# Altium PCB PCB1.PcbDoc
Units mil, origin at the board's own origin, x right, y up, seen from the top; angles counter-clockwise.
Board outline 2675.03 x 2095.03 mil, 2 copper layers (Top Layer, Bottom Layer); 38 components, 33 nets, 171 pads, 4 vias.
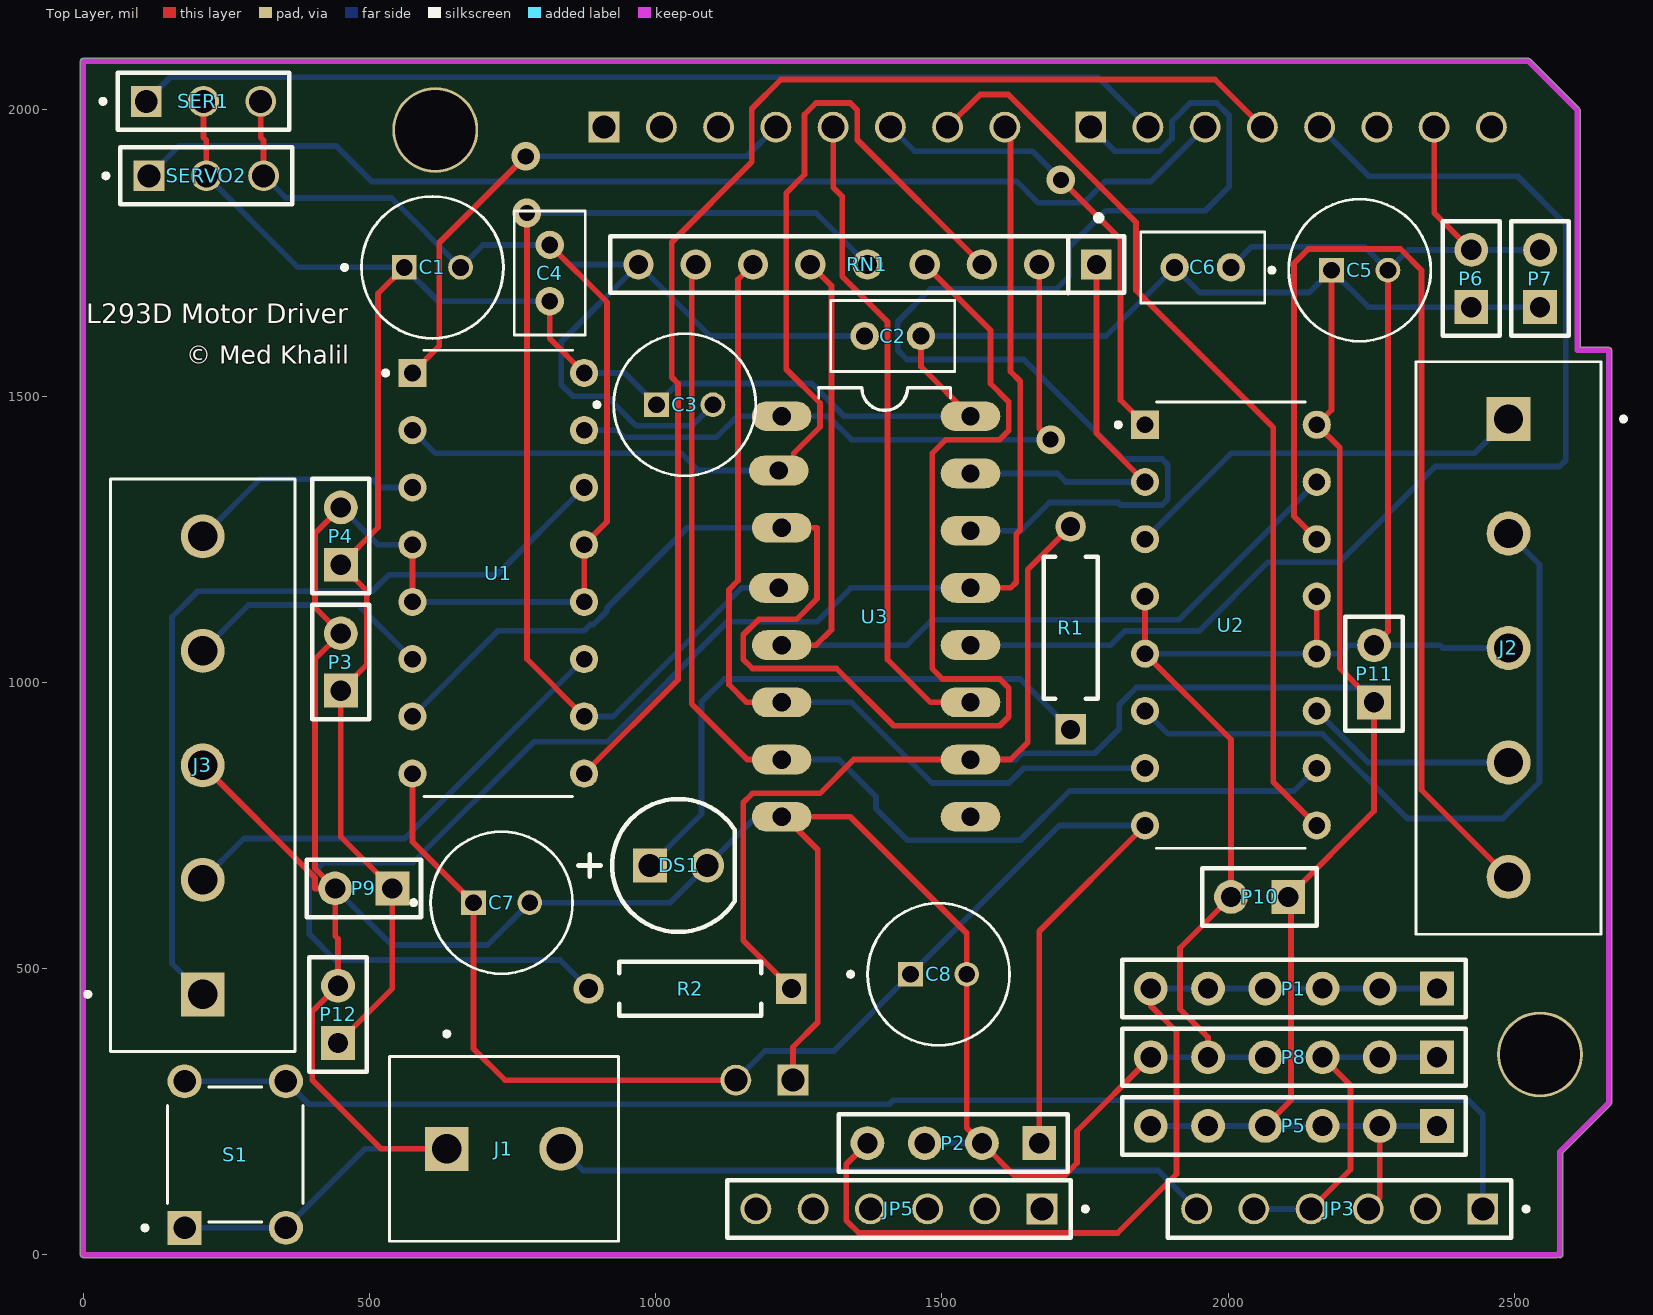
[diagram p0: Top Layer view]
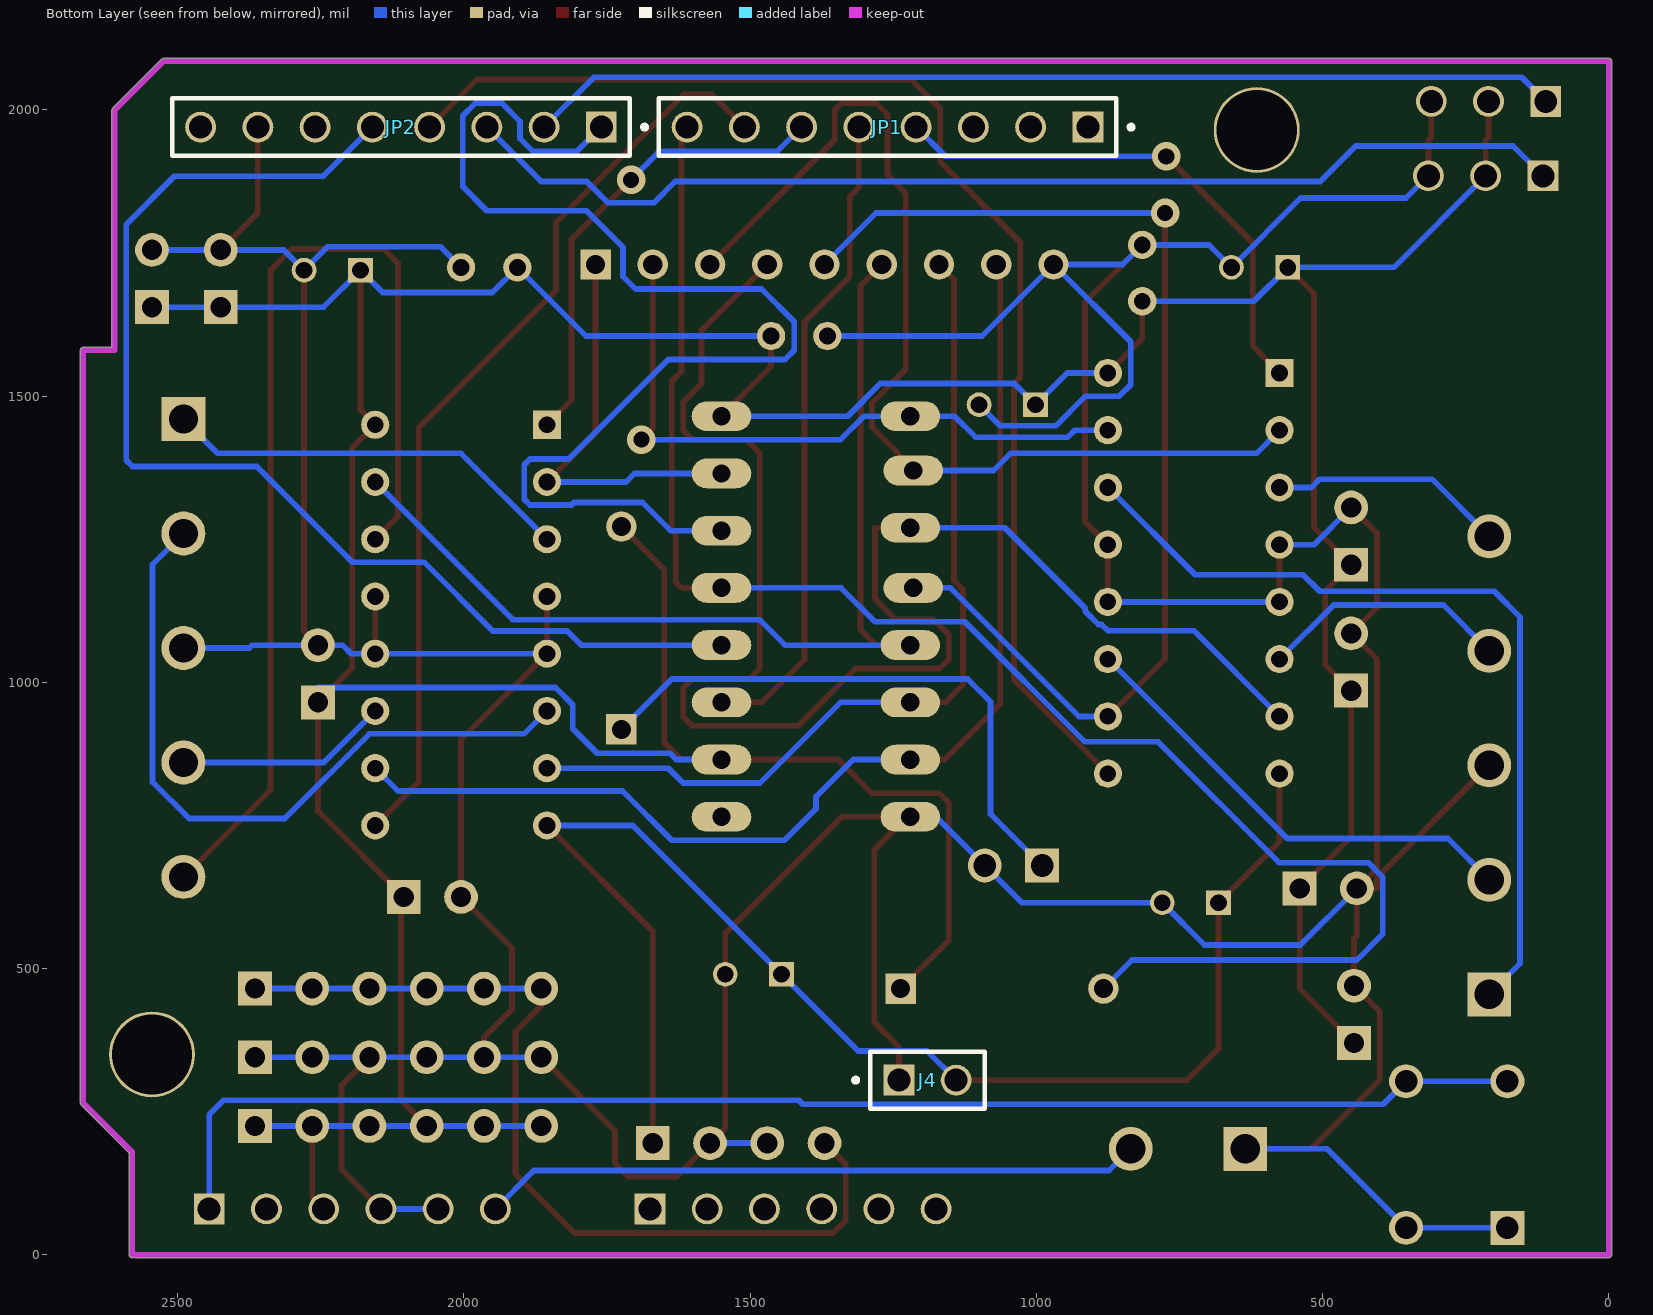
[diagram p1: Bottom Layer view, seen from below]
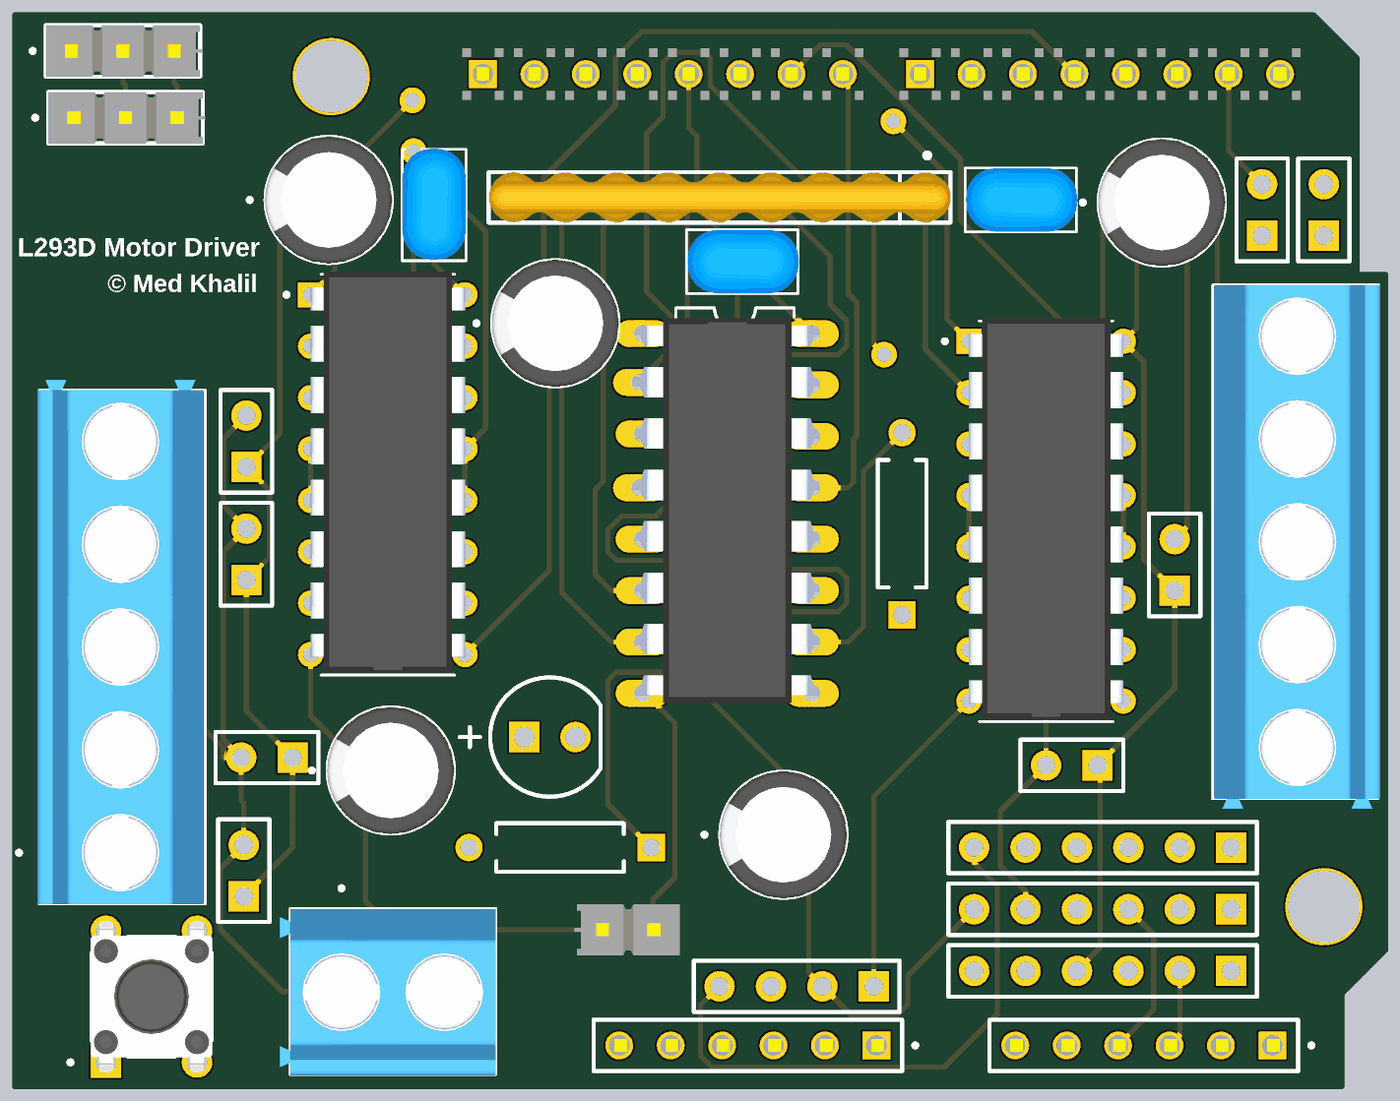
[diagram p2: 3D render of the assembled board from above, using the file's embedded part models]
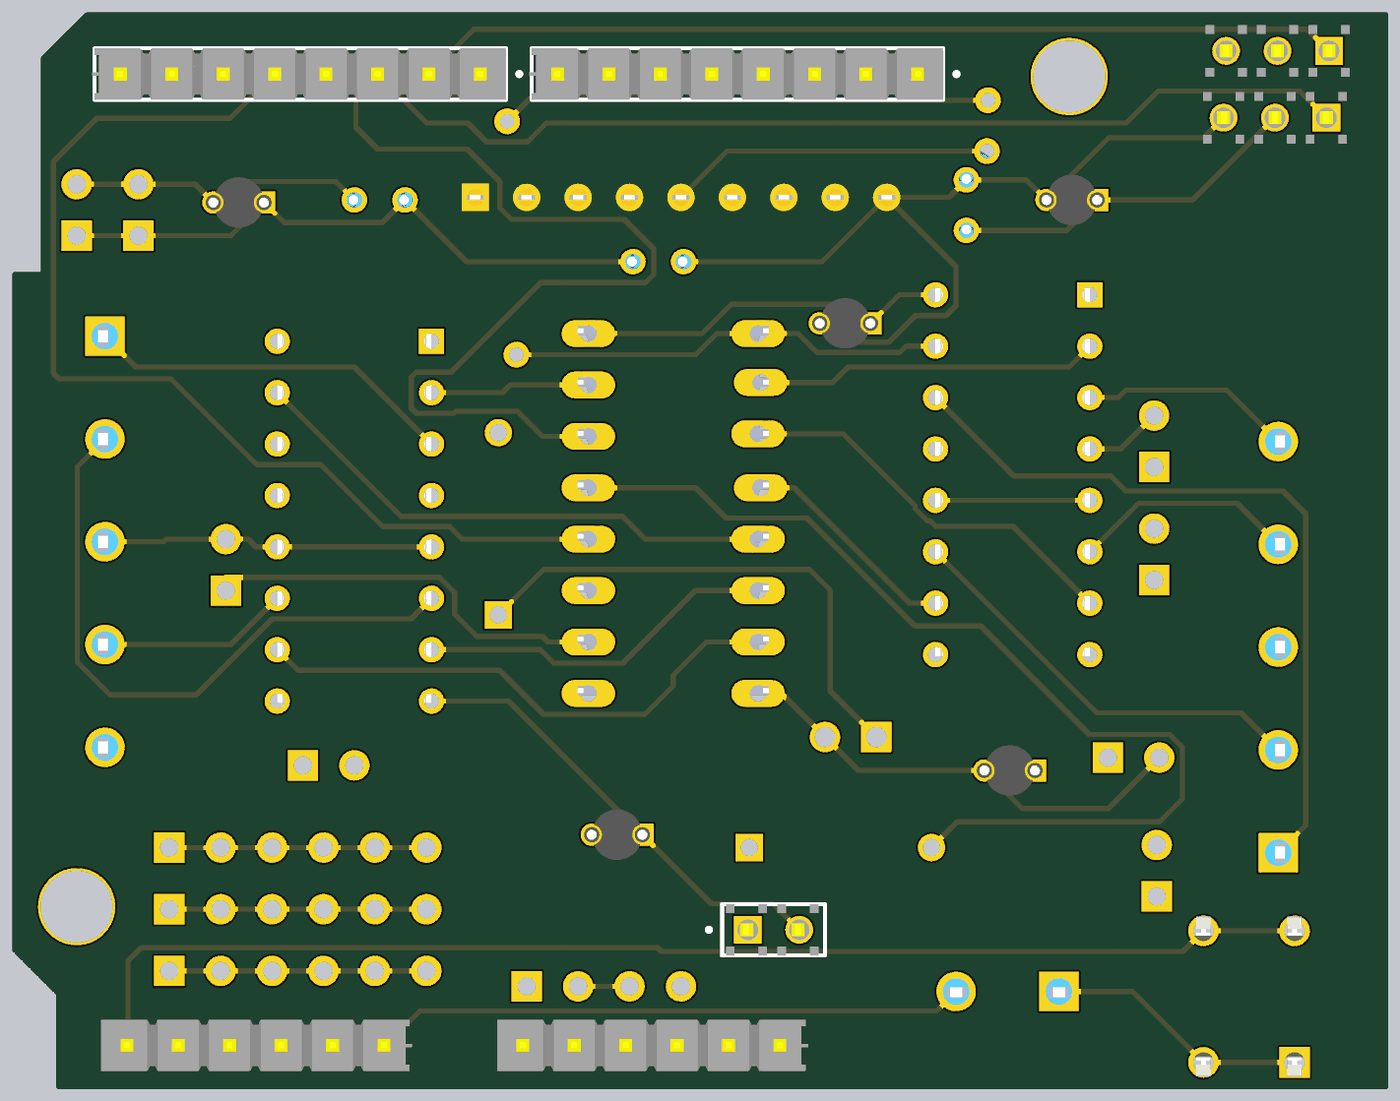
[diagram p3: 3D render of the assembled board from below, using the file's embedded part models]

## Layer stack, top to bottom
Top Solder: solder mask 0.4, Solder Resist, Dk 3.5
Top Layer: signal copper 1.4
Dielectric 1: dielectric 12.6, FR-4, Dk 4.8
Bottom Layer: signal copper 1.4
Bottom Solder: solder mask 0.4, Solder Resist, Dk 3.5

## Board outline
-5.01,0 -5.02,2085 cw(c0,2085) 0,2090.01 2525,2090.01 2528.55,2088.55 2613.55,2003.55 2615.01,2000 2615.01,1585.02 2665,1585.02 cw(c2665,1580) 2670.01,1580 2670.01,265 2668.55,261.45 2585.01,177.92 2585.01,0 cw(c2580,0) 2577.5,-4.35 2575,-5.01 0,-5.01 cw(c0,0)

## Design rules (kind name [scope] priority, off if disabled: settings)
Clearance [All] p1: gap=10 ignorepadtopadclearanceinfootprint=FALSE
PolygonConnect [All] p1: connectstyle=Relief reliefconductorwidth=10 reliefentries=4 polygonreliefangle="90 Angle" airgapwidth=10
RoutingVias [All] p1: holewidth=28 width=50 viastyle="Through Hole" minholewidth=28 minwidth=50 maxholewidth=28 maxwidth=50
SolderMaskExpansion [All] p1: expansion=4 istentingtop=FALSE
SupplyNets "Schematic Supply Nets_2" [InNet('+5')] p1: voltage=0.000
SupplyNets "Schematic Supply Nets_3" [InNet('V+')] p2: voltage=0.000
SupplyNets "Schematic Supply Nets_1" [InNet('VCC')] p3: voltage=0.000
SupplyNets "Schematic Supply Nets" [InNet('GND')] p4: voltage=0.000
Width [All] p1: maxlimit=10 minlimit=10 preferedwidth=10
30 further rules are at their usual default settings.

## Components (designator, comment, footprint, x,y, rotation, side; value= is the part's Value field where it differs from the comment)
C1 "EEUFC1E101S" CAPPRD250W50D630H1120 610,1725 r0 top
C2 "RCE5C1H104J2A2H03B" CAP_RCE5C1H104J2A2H03B 1414.21,1605 r0 top
C3 "EEUFC1E101S" CAPPRD250W50D630H1120 1050.79,1485 r0 top
C4 "RCE5C1H104J2A2H03B" CAP_RCE5C1H104J2A2H03B 815,1715 r90 top
C5 "EEUFC1E101S" CAPPRD250W50D630H1120 2230,1720 r0 top
C6 "RCE5C1H104J2A2H03B" CAP_RCE5C1H104J2A2H03B 1955.79,1725 r0 top
C7 "EEUFC1E101S" CAPPRD250W50D630H1120 730.79,615 r0 top
C8 "EEUFC1E101S" CAPPRD250W50D630H1120 1494.21,490 r0 top
DS1 "G502DC" CGX-G502DC 1040,680 r0 top
J1 "TB006-508-02BE" CUI_TB006-508-02BE 635,185 r0 top
J2 "TB006-508-05BE" CUI_TB006-508-05BE 2490,1460 r270 top
J3 "TB006-508-05BE" CUI_TB006-508-05BE 208.66,455 r90 top
J4 "TSW-102-07-G-S" SAMTEC_TSW-102-07-G-S 1190,305 r180 bottom
JP1 "TSW-108-07-G-S" SAMTEC_TSW-108-07-G-S 1260,1970 r0 bottom
JP2 "TSW-108-07-G-S" SAMTEC_TSW-108-07-G-S 2110,1970 r0 bottom
JP3 "TSW-106-07-G-S" SAMTEC_TSW-106-07-G-S 2195,80 r180 top
JP5 "TSW-106-07-G-S" SAMTEC_TSW-106-07-G-S 1425,80 r180 top
P1 "Header 6" HDR1X6 2365,465 r180 top
P2 "Header 4" HDR1X4 1670,195 r180 top
P3 "Header 2" HDR1X2 450,985.5 r90 top
P4 "Header 2" HDR1X2 450,1205.5 r90 top
P5 "Header 6" HDR1X6 2365,225 r180 top
P6 "Header 2" HDR1X2 2425,1655.5 r90 top
P7 "Header 2" HDR1X2 2545,1655.5 r90 top
P8 "Header 6" HDR1X6 2365,345 r180 top
P9 "Header 2" HDR1X2 540,640 r180 top
P10 "Header 2" HDR1X2 2105,625 r180 top
P11 "Header 2" HDR1X2 2255,965 r90 top
P12 "Header 2" HDR1X2 445,370 r90 top
R1 "MFR-25FBF52-10K" RESA60-630X240 1725,1095 r90 top value=2k
R2 "MFR-25FBF52-10K" RESA60-630X240 1060,465 r180 top value=10k
RN1 "4609X-101-103LF" FP-4609X-MFG 1370,1730 r180 top
S1 "TS02-66-60-BK-100-LCR-D" SW_TS02-66-60-BK-100-LCR-D 265.48,175 r90 top
SER1 "TSW-103-07-G-S" SAMTEC_TSW-103-07-G-S 210,2015 r0 top
SERVO2 "TSW-103-07-G-S" SAMTEC_TSW-103-07-G-S 215,1885 r0 top
U1 "L293DNE" DIP762W45P254L1980H508Q16 725,1190.5 r0 top
U2 "L293DNE" DIP762W45P254L1980H508Q16 2005,1100 r0 top
U3 "LOGIC-74HC595N(DIP16)" DIP16-2.54-20.32X5.84MM 1400,1115 r270 top

## Footprints (in the part's own frame and the unit in brackets; to place one, negate y for a bottom-side part, rotate by r counter-clockwise, add the part's x,y. Pads: shape width x height; smd on the part's side, far side on the other; paste and mask are expansions set on the pad)
CAP_RCE5C1H104J2A2H03B [mm]
  round 1.258 hole 0.75: 1(-1.25,0) 2(1.25,0)
  silkscreen extent -2.75,-1.58 2.75,1.58, body extent -2.71,-1.58 2.79,1.58, height 5.5
CAPPRD250W50D630H1120 [mm]
  round 1.1 hole 0.75: N(1.25,0)
  rect 1.1x1.1 hole 0.75: P(-1.25,0)
  silkscreen extent -4,-3.15 3.15,3.15, body extent -3.15,-3.14 3.15,3.14, height 10.26
CGX-G502DC [mm] "THD, 2-Leads, Dia 5.9mm, Pin Spacing 2.54mm"
  rect 1.5x1.5 hole 1: 1(-1.27,0)
  round 1.5 hole 1: 2(1.27,0)
  silkscreen extent -4.45,-2.95 2.5,2.95, body extent -2.95,-2.95 2.5,2.95, height 9.1
CUI_TB006-508-02BE [mm]
  rect 1.95x1.95 / inner round 1.95 / far side rect 1.95x1.95 hole 1.3: 1(0,0)
  round 1.95 hole 1.3: 2(5.08,0)
  silkscreen extent -2.54,-4.1 7.62,5.2, body extent -3.04,-4.14 7.62,4.06, height 10
CUI_TB006-508-05BE [mm]
  rect 1.95x1.95 / inner round 1.95 / far side rect 1.95x1.95 hole 1.3: 1(0,0)
  round 1.95 hole 1.3: 2(5.08,0) 3(10.16,0) 4(15.24,0) 5(20.32,0)
  silkscreen extent -2.54,-4.1 22.86,5.2, body extent -2.54,-4.01 23.36,4.19, height 10
DIP16-2.54-20.32X5.84MM [mil]
  oval 52x104 hole 32: 1(-350,-180) 2(-255,-185) 3(-155,-180) 4(-50,-185) 5(50,-180) 6(150,-180) 7(250,-180) 8(350,-180) 9(350,150) 10(250,150) 11(150,150) 12(50,150) 13(-50,150) 14(-150,150) 15(-250,150) 16(-350,150)
  silkscreen extent -400,-115 -360,115, body extent -380,-201 369,171, height 165
DIP762W45P254L1980H508Q16 [mm]
  rect 1.248x1.248 / inner round 1.248 / far side rect 1.248x1.248 hole 0.74: 1(-3.81,8.89)
  round 1.248 hole 0.74: 2(-3.81,6.35) 3(-3.81,3.81) 4(-3.81,1.27) 5(-3.81,-1.27) 6(-3.81,-3.81) 7(-3.81,-6.35) 8(-3.81,-8.89) 9(3.81,-8.89) 10(3.81,-6.35) 11(3.81,-3.81) 12(3.81,-1.27) 13(3.81,1.27) 14(3.81,3.81) 15(3.81,6.35) 16(3.81,8.89)
  silkscreen extent -5.1,-9.9 3.3,9.9, body extent -3.81,-9.78 3.81,10.03, height 5.08
FP-4609X-MFG [mm]
  rect 1.35x1.35 hole 0.85 paste-2539.97 mask+0: 1(-10.16,0)
  round 1.35 hole 0.85 paste-2539.97 mask+0: 2(-7.62,0) 3(-5.08,0) 4(-2.54,0) 5(0,0) 6(2.54,0) 7(5.08,0) 8(7.62,0) 9(10.16,0)
  silkscreen extent -11.41,-2.19 11.41,1.27, body extent -11.41,-1.24 11.4,1.24, height 5.07
HDR1X2 [mm] "Connector; Header; 2 Position"
  rect 1.5x1.5 hole 0.9: 1(0,0)
  round 1.5 hole 0.9: 2(2.54,0)
  silkscreen extent -1.27,-1.27 3.81,1.27
HDR1X4 [mm] "Connector; Header; 4 Position"
  rect 1.5x1.5 hole 0.9: 1(0,0)
  round 1.5 hole 0.9: 2(2.54,0) 3(5.08,0) 4(7.62,0)
  silkscreen extent -1.27,-1.27 8.89,1.27
HDR1X6 [mm] "Connector; Header; 6 Position"
  rect 1.5x1.5 hole 0.9: 1(0,0)
  round 1.5 hole 0.9: 2(2.54,0) 3(5.08,0) 4(7.62,0) 5(10.16,0) 6(12.7,0)
  silkscreen extent -1.27,-1.27 13.97,1.27
RESA60-630X240 [mm] "Axial Resistor, 2-Leads, Dia 2.4mm, Body Length 6.3mm"
  rect 1.35x1.35 hole 0.85: 1(-4.5,0)
  round 1.35 hole 0.85: 2(4.5,0)
  silkscreen extent -3.15,-1.2 3.15,1.2, body extent -4.77,-1.19 4.77,1.2, height 2.4
SAMTEC_TSW-102-07-G-S [mm]
  rect 1.37x1.37 / inner round 1.37 / far side rect 1.37x1.37 hole 1.02: 01(-1.27,0)
  round 1.37 hole 1.02: 02(1.27,0)
  silkscreen extent -3.29,-1.27 2.54,1.27, body extent -2.6,-1.27 2.6,1.27, height 7.89
SAMTEC_TSW-103-07-G-S [mm]
  rect 1.37x1.37 hole 1.02: 01(-2.54,0)
  round 1.37 hole 1.02: 02(0,0) 03(2.54,0)
  silkscreen extent -4.56,-1.27 3.81,1.27, body extent -3.81,-1.27 3.94,1.27, height 7.89
SAMTEC_TSW-106-07-G-S [mm]
  rect 1.37x1.37 hole 1.02: 01(-6.35,0)
  round 1.37 hole 1.02: 02(-3.81,0) 03(-1.27,0) 04(1.27,0) 05(3.81,0) 06(6.35,0)
  silkscreen extent -8.37,-1.27 7.62,1.27, body extent -7.68,-1.27 7.68,1.27, height 2.04
SAMTEC_TSW-108-07-G-S [mm]
  rect 1.37x1.37 hole 1.02: 01(-8.89,0)
  round 1.37 hole 1.02: 02(-6.35,0) 03(-3.81,0) 04(-1.27,0) 05(1.27,0) 06(3.81,0) 07(6.35,0) 08(8.89,0)
  silkscreen extent -10.91,-1.27 10.16,1.27, body extent -10.16,-1.27 10.29,1.27, height 7.89
SW_TS02-66-60-BK-100-LCR-D [mm]
  rect 1.508x1.508 / inner round 1.508 / far side rect 1.508x1.508 hole 1: 1(-3.25,2.25)
  round 1.508 hole 1: 2(3.25,2.25) 3(-3.25,-2.25) 4(3.25,-2.25)
  silkscreen extent -3.35,-3 3,4.1, body extent -3.95,-3 3.95,3, height 6

## Part data
C1 C3 C5 C7 C8: "FC-A", Package=None, Availability=Unavailable, MP=EEUFC1E101S, Price=None
C2 C4 C6: "Multilayer Ceramic Capacitors MLCC - Leaded", Package=None, Availability=Unavailable, MP=RCE5C1H104J2A2H03B, Price=None
DS1: library part CMP-007-00008-2, "Green LED, 80 mW, 20 mA, -25 to 85 degC, 2-Pin THD", Manufacturer="Shenzhen CGX", Package Description="2-Pin Through Hole Device, Dia 5.9 mm", Case/Package=G502DC, Datasheet URL=http://datasheet.octopart.com/G502DC-Chengguangxing-datasheet-62330340.pdf, Datasheet Version=Sep-14, Manufacturer URL=http://szcgx.com/, Mounting Technology=TH, Package Reference=G502DC, RoHS Compliant=Unknown
J1 J2 J3: "2~24 Poles, Screw Type, Horizontal, 5.08 Pitch, 26~14 (AWG), Terminal Block Connector", Package=None, MF="Same Sky"
  J1: Check_prices=https://www.snapeda.com/parts/TB006-508-02BE/Same+Sky/view-part/?ref=eda, MP=TB006-508-02BE, SnapEDA_Link=https://www.snapeda.com/parts/TB006-508-02BE/Same+Sky/view-part/?ref=snap
  J2 J3: Check_prices=https://www.snapeda.com/parts/TB006-508-05BE/Same+Sky/view-part/?ref=eda, MP=TB006-508-05BE, SnapEDA_Link=https://www.snapeda.com/parts/TB006-508-05BE/Same+Sky/view-part/?ref=snap
J4 JP1 JP2 JP3 JP5 SER1 SERVO2: Package=None, Availability=Unavailable, Price=None
  J4: MF=Samtec, MP=TSW-102-07-G-S
  JP1 JP2: MF=Samtec, MP=TSW-108-07-G-S
  JP3 JP5: MF="Samtec Inc.", MP=TSW-106-07-G-S
  SER1 SERVO2: MF=Samtec, MP=TSW-103-07-G-S
P1 P5 P8: library part CMP-002-00178-1, "Header, 6-Pin", Component Type=Standard, Design Item ID="Header 6", LatestRevisionDate=17-Jul-2002, LatestRevisionNote="Re-released for DXP Platform.", Pins=6, Publisher="Altium Limited", Source="Miscellaneous Connectors.SchLib"
P2: library part CMP-002-00168-1, "Header, 4-Pin", Component Type=Standard, Design Item ID="Header 4", LatestRevisionDate=17-Jul-2002, LatestRevisionNote="Re-released for DXP Platform.", Pins=4, Publisher="Altium Limited", Source="Miscellaneous Connectors.SchLib"
P3 P4 P6 P7 P9 P10 P11 P12: library part CMP-002-00141-1, "Header, 2-Pin", Component Type=Standard, Design Item ID="Header 2", LatestRevisionDate=17-Jul-2002, LatestRevisionNote="Re-released for DXP Platform.", Pins=2, Publisher="Altium Limited", Source="Miscellaneous Connectors.SchLib"
R1 R2: library part CMP-009-00047-4, "Axial Resistor, 10 KOhm, +/- 1%, 0.25 W, -55 to 155 degC, 2-Pin THD, RoHS, Bulk", Case/Package=Axial, Manufacturer=Yageo, Max Operating Temperature=155°C, Min Operating Temperature=-55°C, Package Description="2-Pin Axial Lead, Dia 2.4 mm, Body Length 6.3 mm", Package Quantity=200, Package Reference=MFR-25, Power=250mW, Tolerance=1%, Voltage Rating=250V, Datasheet URL=http://www.yageo.com/documents/recent/Yageo%20LR_MFR_2013.pdf, Datasheet Version=Apr-13, Manufacturer URL=http://www.yageo.com/, Mounting Technology=TH, Packaging=Bulk, RoHS Compliant=True
RN1: library part CMP-2000-05605-2, "RES ARRAY 8 RES 10K OHM 9SIP", Case/Package=SIP, Insulation Resistance=10MR, Max Operating Temperature=125°C, Min Operating Temperature=-55°C, Number of Resistors=8, Package Quantity=200, Power Per Element=200mW, Power Rating=1.13W, Resistance=10kR, Resistance Tolerance=2%, Temperature Coefficient=100ppm/°C, Voltage Rating=100V, Circuit Type=Bussed, Contact Plating=Copper, Depth=2.49mm, Height=0.2inch, Lead Length=3.43mm, Lead Pitch=2.49mm, Length=22.81mm, Military Standard=Not, Mount="Through Hole", Number of Elements=8, Number of Pins=9, Number of Terminals/Pins=9, Packaging=Bulk, Radiation Hardening=No, REACH SVHC="No SVHC", RoHS Compliant=Yes, Series=4600X, Technology="THICK FILM", Terminal Pitch=2.54mm, Termination=Pin, Tolerance=2%, Width=0.098inch
S1: "6 x 6 mm, 6 mm Actuator Height, 100 gf, Black, Long Crimped, Through Hole, SPST, Tactile Switch", Package=None, Check_prices=https://www.snapeda.com/parts/TS02-66-60-BK-100-LCR-D/Same+Sky/view-part/?ref=eda, MF="Same Sky", MP=TS02-66-60-BK-100-LCR-D, SnapEDA_Link=https://www.snapeda.com/parts/TS02-66-60-BK-100-LCR-D/Same+Sky/view-part/?ref=snap
U1 U2: "Quadruple Half-H Drivers", Package="PDIP-16 Texas Instruments", Check_prices=https://www.snapeda.com/parts/L293DNE/Texas+Instruments/view-part/?ref=eda, MF="Texas Instruments", MP=L293DNE, SnapEDA_Link=https://www.snapeda.com/parts/L293DNE/Texas+Instruments/view-part/?ref=snap
U3: "Shift Shift Register 1 Element 8 Bit 16-PDIP", Package="SOT38-4-16 Nexperia", Availability="In Stock", Check_prices=https://www.snapeda.com/parts/74HC595N/Texas+Instruments/view-part/?ref=eda, MF="Texas Instruments", MP=74HC595N, Price=None, Purchase-URL=https://pricing.snapeda.com/search/part/74HC595N/?ref=eda, SnapEDA_Link=https://www.snapeda.com/parts/74HC595N/Texas+Instruments/view-part/?ref=snap

## Free pads (board coordinates)
  round 150 hole 140: 2(615,1965) 2(2545,350)

## Via types
v1: diameter 50, hole 28, Top Layer to Bottom Layer, 4 vias

## Nets (pads, with @x,y where several pads share a name; then routed paths per layer and width w, separated by ;. In a path a pad name is that pad's centre, name@x,y a point inside that pad or via, vN(x,y) a via of type N, cw(c..) or ccw(c..) an arc to the next point about the centre after c; other vN are vias at no path point)
+5: P1.1 P1.2 P1.3 P1.4 P1.5 P1.6 P2.4 | length 1621.7
  Top Layer w10: P2.4 1333,158 1333,60 1355,38 1807,38 1910,141 1910,390 1865,435 P1.6
  Bottom Layer w10: P1.6 P1.5 P1.4 P1.3 P1.2 P1.1
DIR_CLK: JP1.05 U3.11 | length 1145.4
  Top Layer w10: JP1.05 1310,1865 1326,1849 1326,1709 1405,1630 1405,1040 1480,965 U3.11
DIR_EN: JP1.08 R2.2 U3.13 | length 2890.4
  Top Layer w10: U3.13 1620,1165 1630,1175 1630,1259 1637,1266 1637,1526 1620,1543 1620,1970 JP1.08
  Bottom Layer w10: R2.2 832.83,515 440,515 395,560 395,660 420,685 576,685 787,896 915,896 1125,1106 1282,1106 1341,1165 U3.13
DIR_LATCH: JP2.05 U3.12 | length 2086.2
  Bottom Layer w10: U3.12 1795,1065 1819.57,1089.57 1949.57,1089.57 2070,1210 2195,1210 2362,1377 2579,1377 2590,1388 2590,1800 2506,1884 2246,1884 JP2.05
DIR_SER: JP2.01 U3.14 | length 2186.5
  Bottom Layer w10: U3.14 1639,1265 1688,1314 1808,1314 1812,1310 1884.57,1310 1894.57,1320 1894.57,1380 1884.57,1390 1817,1390 1643,1564 1439,1564 1423,1580 1423,1630 1480,1687 1700,1687 1722,1709 1722,1760 1786,1824 1960,1824 2002,1866 2002,1990 1980,2012 1934,2012 1902,1980 1902,1950.03 1880,1928.03 1801.97,1928.03 JP2.01
GND: C1.N C2.1 C3.N C4.2 C5.N C6.2 C7.N C8.N DS1.2 J1.1 J2.3 J3.3 J4.01 JP2.07 JP3.04 JP3.05 P2.2 P2.3 P3.2 P4.2 P6.2 P7.2 P8.1 P8.2 P8.3 P8.4 P8.5 P8.6 P9.2 P10.2 P11.2 P12.2 RN1.9 S1.1 S1.3 SER1.03 SERVO2.03 U1.4 U1.5 U1.12 U1.13 U2.4 U2.5 U2.12 U2.13 U3.8 | length 12176.9
  Top Layer w10: J3.3 405,658.66 405,640 P9.2 ; SER1.03 310,1952 315,1947 SERVO2.03 ; P4.2 405,1260.5 405,1130.5 P3.2 405,1040.5 405,675 P9.2 ; U1.5 U1.4 ; J1.1 520,185 400,305 400,425 P12.2 445,552 440,557 P9.2 ; C4.2 915,1664.21 915,1280.5 U1.13 U1.12 ; U3.8 U3.8@1225.39,765 ; J4.01 1240,363 1283,406 1283,707.39 U3.8@1225.39,765 ; U2.4 U2.5 2005,900 P10.2 1916,536 1916,429 1965,380 P8.5 ; P8.6 1736,216 1736,160 1712,136 1629,136 P2.2 1543.43,221.57 C8.N 1543.43,561.57 1340,765 U3.8@1225.39,765 ; JP3.04 2214,149 2214,296 P8.3 ; U2.12 U2.13 ; P11.2 2279.21,1089.21 C5.N ; JP2.07 2360,1820.5 P6.2
  Bottom Layer w10: S1.1 S1.3 492.02,185 J1.1 ; SERVO2.03 354,1846 538.21,1846 C1.N 698.42,1764.21 C4.2 849.21,1730 RN1.9 ; P9.2 539,541 706,541 C7.N 1025,615 DS1.2 1175,765 U3.8 ; P4.2 515,1240.5 U1.4 ; U1.5 U1.12 ; C3.N 1063.35,1448.35 965.65,1448.35 914,1500 855,1500 835,1520 835,1595 RN1.9 ; C2.1 1095,1605 RN1.9 ; P2.3 P2.2 ; U2.5 U2.12 2197,1050 2212,1065 P11.2 2370,1065 2375,1060 J2.3 ; P8.6 P8.5 P8.4 P8.3 P8.2 P8.1 ; C6.2 2041,1761 2238.21,1761 C5.N 2314.71,1755.5 P6.2 P7.2 ; JP3.05 JP3.04
M1A: RN1.3 U1.2 U3.2 | length 1839.5
  Top Layer w10: U3.2 1241,1370 1241,1400 1287,1446 1287,1488 1228,1547 1228,1855 1260,1887 1260,1992 1280,2012 1340,2012 1352,2000 1352,1948 RN1.3
  Bottom Layer w10: U1.2 615.5,1400 1045,1400 1075,1370 U3.2
M1B: RN1.4 U1.7 U3.3 | length 2763
  Top Layer w10: U3.3 1282,1270 1282,1146 1246,1110 1180,1110 1153,1083 1153,1040 1169,1024 1316,1024 1416,924 1601,924 1617,940 1617,990 1601,1006 1501,1006 1483,1024 1483,1400 1507,1424 1601,1424 1617,1440 1617,1490 1585,1522 1585,1615 RN1.4
  Bottom Layer w10: U1.7 724.5,1090 875,1090 885.93,1100.93 891.39,1100.93 914.57,1124.11 914.57,1129.57 1055,1270 U3.3
M2A: RN1.2 U1.15 U3.1 | length 1166.5
  Top Layer w10: RN1.2 1670,1444 v1(1690,1424)
  Bottom Layer w10: U1.15 932.77,1440.5 944.92,1428.35 1106.35,1428.35 1143,1465 U3.1 1301,1465 1342,1424 v1(1690,1424)
M2B: RN1.5 U1.10 U3.4 | length 1986.2
  Top Layer w10: v1(775,1820) 775,1040.5 U1.10
  Bottom Layer w10: v1(775,1820) 1280,1820 RN1.5 ; U1.10 925.5,940.5 1150,1165 U3.4
M3A: RN1.1 U2.2 U3.15 | length 726.4
  Top Layer w10: RN1.1 1770,1435 U2.2
  Bottom Layer w10: U3.15 1702,1365 1717,1350 U2.2
M3B: RN1.7 U2.7 U3.6 | length 1560.4
  Top Layer w10: RN1.7 1144,1704 1144,1177.75 1128,1161.75 1128,996 1159,965 U3.6
  Bottom Layer w10: U3.6 1342,965 1483,824 1617,824 1643,850 U2.7
M4A: RN1.6 U2.15 U3.5 | length 1804.6
  Top Layer w10: U3.5 1280,1065 1307,1092 1307,1693 RN1.6
  Bottom Layer w10: U3.5 1439,1065 1483.57,1109.57 1914.57,1109.57 U2.15
M4B: RN1.8 U2.10 U3.7 | length 2030.1
  Top Layer w10: RN1.8 1063,1730 1063,962 1160,865 U3.7
  Bottom Layer w10: U3.7 1320,865 1385,800 1385,779 1440,724 1637,724 1723,810 2115,810 U2.10
NetDS1_1: DS1.1 R1.1 | length 1021.4
  Bottom Layer w10: DS1.1 1080,770 1080,966 1120,1006 1636.83,1006 R1.1
PWM0A: JP1.07 U2.9 | length 1629.8
  Top Layer w10: JP1.07 1567,2027 1615.91,2027 1839,1803.91 1839,1685 2079,1445 2079,826 U2.9
PWM0B: JP1.06 U2.1 | length 825
  Top Layer w10: v1(1708,1878) 1812,1774 1812,1493 U2.1
  Bottom Layer w10: JP1.06 1452,1928 1658,1928 v1(1708,1878)
PWM1A: JP2.03 SERVO2.01 | length 1962.2
  Bottom Layer w10: SERVO2.01 167,1937 442,1937 504,1875 1631,1875 1668,1838 1748.37,1838 1785.37,1875 1865,1875 JP2.03
PWM1B: JP2.02 SER1.01 | length 1803.4
  Bottom Layer w10: SER1.01 152,2057 1773,2057 JP2.02
PWM2A: JP2.04 U1.9 | length 2239.5
  Top Layer w10: U1.9 1039,1004.5 1039,1522 1028,1533 1028,1769 1168,1909 1168,2002 1219,2053 1977,2053 JP2.04
PWM2B: JP1.04 U1.1 | length 918.6
  Top Layer w10: U1.1 622,1587.5 622,1768 v1(773,1919)
  Bottom Layer w10: v1(773,1919) 1159,1919 JP1.04
PWRJMP: J1.2 JP3.06 | length 1153.5
  Bottom Layer w10: J1.2 873,147 1878,147 JP3.06
RESET: JP3.01 S1.2 S1.4 | length 2462.9
  Bottom Layer w10: S1.2 S1.4 394.02,263 1408,263 1415,270 2420,270 2445,245 JP3.01
V+: C7.P C8.P J4.02 P2.1 U1.8 U2.8 | length 2536.8
  Top Layer w10: U1.8 575,721.57 C7.P 681.57,360 736.57,305 J4.02 ; P2.1 1670,565 U2.8
  Bottom Layer w10: J4.02 1191,356 1311,356 C8.P 1705,750 U2.8
VCC: C1.P C2.2 C3.P C4.1 C5.P C6.1 JP3.03 P3.1 P4.1 P5.1 P5.2 P5.3 P5.4 P5.5 P5.6 P6.1 P7.1 P9.1 P10.1 P11.1 P12.1 R1.2 R2.1 SER1.02 SERVO2.02 U1.16 U2.16 U3.10 U3.16 | length 8995.5
  Top Layer w10: SER1.02 210,1952 215,1947 SERVO2.02 ; P12.1 540,465 P9.1 450,730 P3.1 495,1030.5 495,1160.5 P4.1 515,1270.5 515,1679.21 C1.P ; C4.1 815,1600.5 U1.16 ; R2.1 1153,549.17 1153,790 1169,806 1287,806 1346,865 U3.10 1620,865 1650,895 1650,1197.17 R1.2 ; C2.2 1463.43,1551.57 U3.16 ; P5.4 2110,270 2110,625 P10.1 2255,775 P11.1 2195,1025 2195,1410 U2.16 2180.79,1475.79 C5.P ; JP3.03 2265,100 P5.2
  Bottom Layer w10: SERVO2.02 375,1725 C1.P 620,1665.79 C4.1 ; U1.16 946.07,1540.5 C3.P 1038.57,1522 1272.5,1522 1329.5,1465 U3.16 ; C2.2 1786.57,1605 C6.1 1950.57,1681 2141.79,1681 C5.P 2245.29,1655.5 P6.1 P7.1 ; U3.10 1629,865 1640,876 1767,876 1810,919 1810,961 1840,991 2255,991 P11.1 ; P5.6 P5.5 P5.4 P5.3 P5.2 P5.1
Y11: J3.5 U1.3 | length 413.8
  Bottom Layer w10: J3.5 308.66,1355 505,1355 519.5,1340.5 U1.3
Y12: J2.1 U2.3 | length 722
  Bottom Layer w10: U2.3 2005,1400 2430,1400 J2.1
Y21: J3.4 U1.6 | length 438.6
  Bottom Layer w10: J3.4 288.66,1135 480.5,1135 U1.6
Y22: J2.2 U2.6 | length 1249.7
  Bottom Layer w10: U2.6 1895,910 2165,910 2313,762 2480,762 2544,826 2544,1206 J2.2
Y31: J3.2 U1.11 | length 826
  Bottom Layer w10: J3.2 280.66,727 561.5,727 U1.11
Y32: J2.4 U2.11 | length 372.3
  Bottom Layer w10: U2.11 2245,860 J2.4
Y41: J3.1 U1.14 | length 1495
  Bottom Layer w10: J3.1 155,508.66 155,1114 200,1159 505,1159 534,1188 722.5,1188 U1.14
Y42: J2.5 U2.14 | length 1870.2
  Top Layer w10: U2.14 2115,1290 2115,1732 2140,1757 2301,1757 2338,1720 2338,812 J2.5
pads on no net: JP1.01 JP1.02 JP1.03 JP2.06 JP2.08 JP3.02 JP5.01 JP5.02 JP5.03 JP5.04 JP5.05 JP5.06 U3.9

## Keep-outs
Keep-Out Layer:
  lines w10: 2580,0 2580,180 2665,265 2665,525 2665,1580 2610,1580 2610,2000 2525,2085 2500,2085 0,2085 0,0 2575,0 2580,5

## Silkscreen, mask and mechanical layers (free items; w line width, h text height)
Top Overlay:
  text "L293D Motor Driver" at 5,1615.7 h58
  text "© Med Khalil" at 180,1545.87 h55